# Altium PCB Lab4_PCB1.PcbDoc
Units mil, origin at the board's own origin, x right, y up, seen from the top; angles counter-clockwise.
Board outline 1355 x 1005 mil, 2 copper layers (Top Layer, Bottom Layer); 12 components, 15 nets, 46 pads, 4 vias.
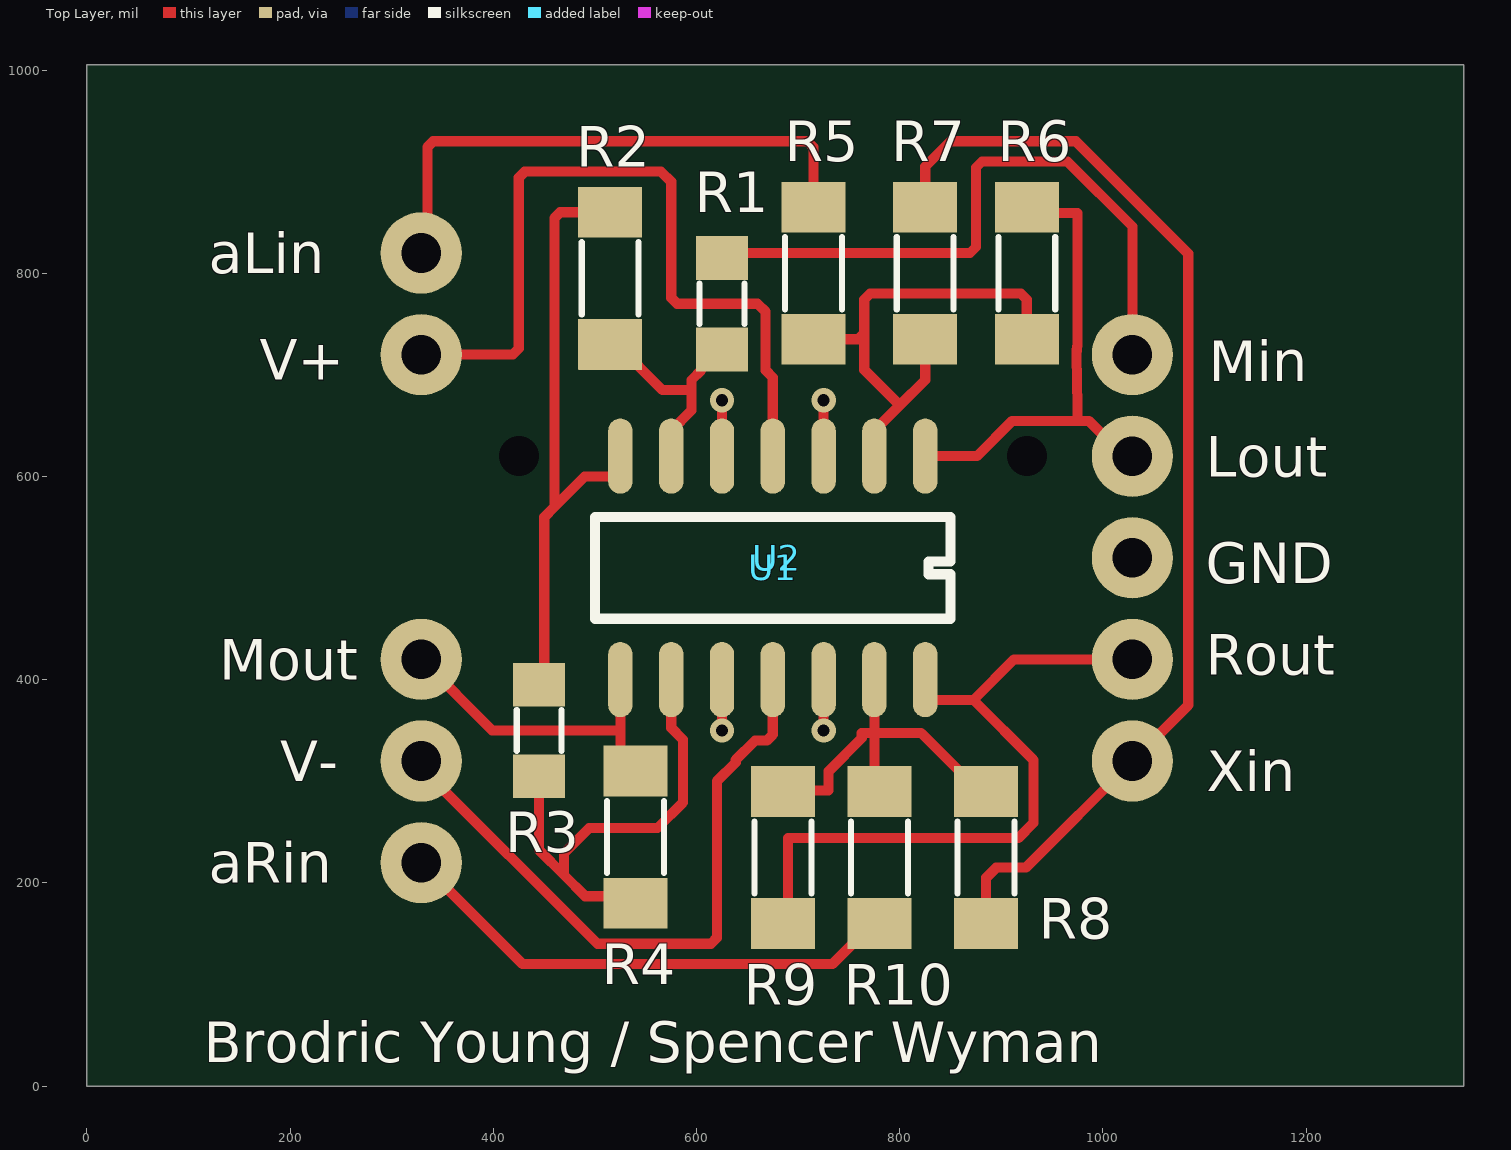
[diagram p0: Top Layer view]
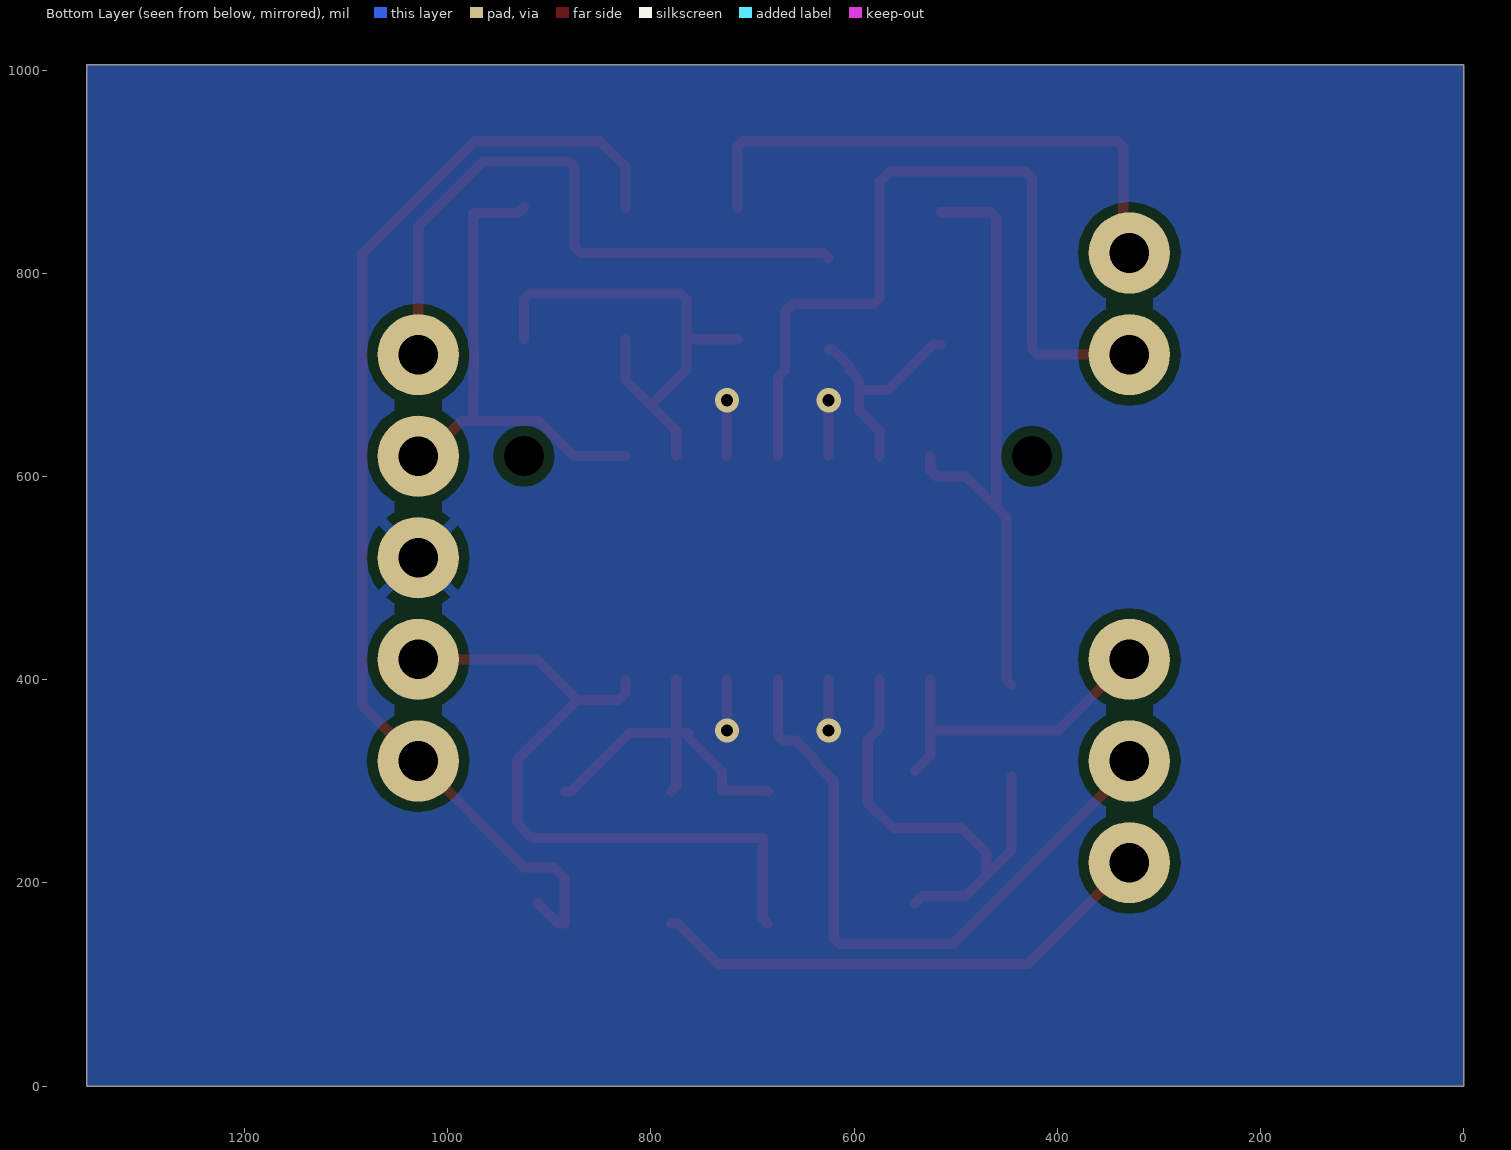
[diagram p1: Bottom Layer view, seen from below]

## Layer stack, top to bottom
Top Solder: solder mask 0.4, Solder Resist, Dk 3.5
Top Layer: signal copper 1.4
Dielectric 1: dielectric 12.6, FR-4, Dk 4.8
Bottom Layer: signal copper 1.4
Bottom Solder: solder mask 0.4, Solder Resist, Dk 3.5

## Board outline
0,0 0,1005 1355,1005 1355,0

## Design rules (kind name [scope] priority, off if disabled: settings)
AssemblyTestPointUsage [All] p1: isadvanced=TRUE
AssemblyTestpoint [All] p1: isadvanced=TRUE testpointundercomponent=TRUE minsize=40 maxsize=100 preferedsize=60 minholesize=0 maxholesize=40 preferedholesize=32 testpointgrid=1 usegrid=TRUE gridtolerance=0.01 allowsidetop=TRUE allowsidebottom=TRUE
Clearance Clearance_1 [OnMid vs OnMid] p1: gap=10 ignorepadtopadclearanceinfootprint=FALSE sourcerule=43 cellrowname=All cellrowtype=0 cellcolname=All cellcoltype=0 innerlayers=TRUE
Clearance Clearance_2 [(ExistsOnLayer('Top Layer') Or ExistsOnLayer('Bottom Layer')) vs (ExistsOnLayer('Top Layer') Or ExistsOnLayer('Bottom Layer'))] p2: gap=10 ignorepadtopadclearanceinfootprint=FALSE sourcerule=43 cellrowname=All cellrowtype=0 cellcolname=All cellcoltype=0 outerlayers=TRUE
Clearance [All] p3: gap=10 ignorepadtopadclearanceinfootprint=FALSE ismatrix=TRUE
ComponentClearance [All] p1: isadvanced=TRUE gap=10 collisioncheckmode=3 verticalgap=10 showdistances=FALSE
FabricationTestPointUsage [All] p1: isadvanced=TRUE valid=0 allowmultiple=FALSE
FabricationTestpoint [All] p1: isadvanced=TRUE side=3 testpointundercomponent=TRUE minsize=40 maxsize=100 preferedsize=60 minholesize=0 maxholesize=40 preferedholesize=32 testpointgrid=1 allowsidetop=TRUE allowsidebottom=TRUE usegrid=TRUE gridtolerance=0.01
FanoutControl Fanout_BGA [IsBGA] p1: isadvanced=TRUE bgadir=Out bgaviamode=Centered fanoutstyle=Auto fanoutdirection=Alternating viagrid=1 // Fanout_BGA (Default Rule)
FanoutControl Fanout_LCC [IsLCC] p2: isadvanced=TRUE bgadir=Out bgaviamode=Centered fanoutstyle=Auto fanoutdirection=Alternating viagrid=1 // Fanout_LCC (Default Rule)
FanoutControl Fanout_SOIC [IsSOIC] p3: isadvanced=TRUE bgadir=Out bgaviamode=Centered fanoutstyle=Auto fanoutdirection=Alternating viagrid=1 // Fanout_SOIC (Default Rule)
FanoutControl Fanout_Small [(CompPinCount < 5)] p4: isadvanced=TRUE bgadir=Out bgaviamode=Centered fanoutstyle=Auto fanoutdirection=OutThenIn viagrid=1 // Fanout_Small (Default Rule)
FanoutControl Fanout_Default [All] p5: isadvanced=TRUE bgadir=Out bgaviamode=Centered fanoutstyle=Auto fanoutdirection=Alternating viagrid=1 // Fanout_Default (Default Rule)
Height [All] p1: isadvanced=TRUE minheight=0 maxheight=1000 prefheight=500
HoleSize [All] p1: isadvanced=TRUE absolutevalues=TRUE maxlimit=100 minlimit=1 maxpercent=80.000 minpercent=20.000
HoleToHoleClearance [All] p1: isadvanced=TRUE gap=10 allowstackedmicrovias=TRUE
LayerPairs [All] p1: isadvanced=TRUE enforce=TRUE
MinimumSolderMaskSliver [All] p1: isadvanced=TRUE minsoldermaskwidth=10
NetAntennae [All] p1: isadvanced=TRUE netantennaetolerance=0
PasteMaskExpansion [All] p1: isadvanced=TRUE expansion=0
PlaneClearance [All] p1: isadvanced=TRUE clearance=20
PlaneConnect [All] p1: isadvanced=TRUE planeconnectstyle=Relief reliefexpansion=20 reliefentries=4 reliefconductorwidth=10 reliefairgap=10
PolygonConnect [All] p1: thpad.connectstyle=Relief thpad.reliefconductorwidth=10 thpad.reliefentries=4 thpad.polygonreliefangle="45 Angle" thpad.airgapwidth=10 smdpad.connectstyle=Relief smdpad.reliefconductorwidth=10 smdpad.reliefentries=4 smdpad.polygonreliefangle="90 Angle" smdpad.airgapwidth=10 via.connectstyle=Direct via.reliefconductorwidth=10 via.reliefentries=4 via.polygonreliefangle="90 Angle" via.airgapwidth=10
RoutingCorners [All] p1: isadvanced=TRUE cornerstyle=45-Degree minsetback=100 maxsetback=100
RoutingPriority [All] p1: isadvanced=TRUE routingpriority=0
RoutingVias [All] p1: holewidth=12 width=24 viastyle="Through Hole" minholewidth=12 minwidth=24 maxholewidth=12 maxwidth=24
ShortCircuit [All] p1: isadvanced=TRUE allowed=FALSE
SilkToSilkClearance [All] p1: isadvanced=TRUE silktosilkclearance=10
SilkToSolderMaskClearance [IsPad] p1: isadvanced=TRUE minsilkscreentomaskgap=10 clearancetoexposedcopper=TRUE
SolderMaskExpansion [All] p1: isadvanced=TRUE expansion=4 istentingtop=FALSE
SupplyNets "Schematic Supply Nets_6" [InNet('aLin')] p1: isadvanced=TRUE voltage=0.000
SupplyNets "Schematic Supply Nets_5" [InNet('Xin')] p2: isadvanced=TRUE voltage=0.000
SupplyNets "Schematic Supply Nets_4" [InNet('V+')] p3: isadvanced=TRUE voltage=0.000
SupplyNets "Schematic Supply Nets_3" [InNet('GND')] p4: isadvanced=TRUE voltage=0.000
SupplyNets "Schematic Supply Nets_2" [InNet('V-')] p5: isadvanced=TRUE voltage=0.000
SupplyNets "Schematic Supply Nets_1" [InNet('Min')] p6: isadvanced=TRUE voltage=0.000
SupplyNets "Schematic Supply Nets" [InNet('aRin')] p7: isadvanced=TRUE voltage=0.000
UnRoutedNet [All] p1: isadvanced=TRUE
UnpouredPolygon [All] p1: isadvanced=TRUE
Width [All] p1: maxlimit=10 minlimit=10 preferedwidth=10
4 further rules are at their usual default settings.

## Components (designator, comment, footprint, x,y, rotation, side; value= is the part's Value field where it differs from the comment)
R1 "KBS_Resistor" KBS_SMD0805 625,815 r270 top value=600
R2 "KBS_Resistor" KBS_SMD1206 515,730 r90 top value=10k
R3 "KBS_Resistor" KBS_SMD0805 445,395 r270 top value=600
R4 "KBS_Resistor" KBS_SMD1206 540,180 r90 top value=10k
R5 "KBS_Resistor" KBS_SMD1206 715,865 r270 top value=10k
R6 "KBS_Resistor" KBS_SMD1206 925,735 r90 top value=10k
R7 "KBS_Resistor" KBS_SMD1206 825,865 r270 top value=10k
R8 "KBS_Resistor" KBS_SMD1206 885,160 r90 top value=10k
R9 "KBS_Resistor" KBS_SMD1206 685,290 r270 top value=10k
R10 "KBS_Resistor" KBS_SMD1206 780,160 r90 top value=10k
U1 "LF347DR" KBS_SO14_w_Guide_Pin_Holes 675,510 r180 top
U2 "10 Pin Header" KBS_10pin_Header_PreA_Mixer 1029,519.93 r0 top locked

## Footprints (in the part's own frame and the unit in brackets; to place one, negate y for a bottom-side part, rotate by r counter-clockwise, add the part's x,y. Pads: shape width x height; smd on the part's side, far side on the other; paste and mask are expansions set on the pad)
KBS_10pin_Header_PreA_Mixer [mil]
  round 80 hole 39 mask+2: 1(-700,300) 2(0,200) 3(-700,200) 4(0,100) 5(-700,-100) 6(0,0) 7(-700,-200) 8(0,-100) 9(-700,-300) 10(0,-200)
  body extent -740,-340 40,340, height 1
KBS_SMD0805 [mil]
  rrect1% 43x51 smd mask+2.5: 1(0,0) 2(90,0)
  silkscreen extent 25,-22 65,22, body extent -21,-26 112,25, height 1
KBS_SMD1206 [mil]
  rrect1% 50x63 smd mask+2.5: 1(0,0) 2(130,0)
  silkscreen extent 30,-28 100,28, body extent -24,-32 155,31, height 1
KBS_SO14_w_Guide_Pin_Holes [mil]
  oval 24x74 smd paste+0 mask+2: 1(-150,-110) 2(-100,-110) 3(-50,-110) 4(0,-110) 5(50,-110) 6(100,-110) 7(150,-110) 8(150,110) 9(100,110) 10(50,110) 11(0,110) 12(-50,110) 13(-100,110) 14(-150,110)
  round 0 hole 39.37 unplated mask+0: MH_1(250,-110) MH_2(-250,-110)
  silkscreen extent -175,-50 175,50, body extent -187,-147 187,147, height 1

## Part data
R1 R2 R3 R4 R5 R6 R7 R8 R9 R10: library part CMP-009-00177-1, "Fixed Resistor, 0.25W, 10000ohm, 200V, Surface Mount, 1206", Case/Package=1206, Manufacturer=Yageo, Manufacturer Part Number=RC1206FR-0710KL, Max Operating Temperature=155°C, Min Operating Temperature=-55°C, Power=250mW, Tolerance=1%, Component Type=Resistors, Mounting Technology="Surface Mount", Pins=2, RoHS Compliant=Yes
U1: library part CMP-014-00002-1, "Operational Amplifier, 4 Func, 13000uV Offset-Max, JFET, PDSO14", Case/Package=SOP, Manufacturer="Texas Instruments", Max Operating Temperature=70°C, Min Operating Temperature=0°C, Nominal Supply Voltage=15V, Channels=4, Component Type=Amplifiers, Manufacturer Part Number=LF347DR, Pins=14, RoHS Compliant=Yes

## Via types
v1: diameter 24, hole 12, Top Layer to Bottom Layer, tented both sides, 4 vias

## Nets (pads, with @x,y where several pads share a name; then routed paths per layer and width w, separated by ;. In a path a pad name is that pad's centre, name@x,y a point inside that pad or via, vN(x,y) a via of type N, cw(c..) or ccw(c..) an arc to the next point about the centre after c; other vN are vias at no path point)
aLin: R5.1 U2.1 | length 550.7
  Top Layer w10: U2.1 335,825.93 335,924.14 340.86,930 709.14,930 715,924.14 R5.1
aRin: R10.1 U2.9 | length 509
  Top Layer w10: U2.9 428.94,120 733.5,120 773.5,160 R10.1
GND: U1.3 U1.5 U1.10 U1.12 U2.6 | length 210
  Top Layer w10: v1(625,350) U1.10 ; U1.5 v1(625,675) ; v1(725,350) U1.12 ; U1.3 v1(725,675)
Lout: R6.2 U1.1 U2.4 | length 489.7
  Top Layer w10: U1.1 875.95,620 910.63,654.69 975,654.69 ; R6.2 930.86,859.14 975,859.14 975,730.38 ccw(c1029,719.93) 974.01,719.05 975,668.83 975,654.69 ; U2.4 1020.72,619.93 985.97,654.69 975,654.69
Min: R1.1 U2.2 | length 654.5
  Top Layer w10: R1.1 630,820 869.14,820 875,825.86 875,904.14 880.86,910 965,910 1029,846 U2.2 U2.2@1020,728.93
Mout: R4.2 U1.8 U2.5 | length 321.2
  Top Layer w10: U2.5 398.94,350 525,350 ; U1.8 525,350 ; R4.2 525,325 525,350
NetR1_2: R1.2 R2.1 U1.6 | length 226.7
  Top Layer w10: R2.1 521.5,730 566.5,685 595,685 ; U1.6 575,645 595,665 595,685 ; R1.2 621,725 604.5,708.5 604.5,704.5 595,695 595,685
NetR3_2: R3.2 R4.1 U1.9 | length 474.3
  Top Layer w10: R3.2 445,232.22 469.52,207.7 ; R4.1 533.27,186.73 490.49,186.73 469.52,207.7 ; U1.9 575,352.57 586.5,341.07 586.5,278.93 561.6,254.04 494.41,254.04 469.52,229.14 469.52,207.7
NetR5_2: R5.2 R6.1 R7.2 U1.2 | length 510.8
  Top Layer w10: R5.2 759.14,735 765,740.86 ; U1.2 775,645 800,670 ; R7.2 825,695 800,670 ; R6.1 925,774.14 919.14,780 770.86,780 765,774.14 765,740.86 ; 765,740.86 765,705 800,670
NetR8_2: R8.2 R9.1 R10.2 U1.13 | length 373.8
  Top Layer w10: R9.1 685.86,290.86 730,290.86 730,310 762.5,342.5 762.5,347.5 775,347.5 ; U1.13 775,347.5 ; R10.2 775,295 775,347.5 ; R8.2 878.5,290 821,347.5 775,347.5
Rout: R9.2 U1.14 U2.8 | length 716.1
  Top Layer w10: R9.2 689.9,164.9 689.9,244.04 916.6,244.04 931.5,258.93 931.5,321.07 872.57,380 ; U1.14 825,386.47 831.47,380 872.57,380 ; U2.8 912.5,419.94 872.57,380
V+: U1.4 U2.3 | length 781.1
  Top Layer w10: U2.3 329.06,720 419.14,720 425,725.86 425,894.14 430.86,900 565,900 575,890 575,775.86 580.86,770 660,770 667.93,762.07 667.93,704.5 675,697.43 U1.4
V-: U1.11 U2.7 | length 655.5
  Top Layer w10: U2.7 329,313.43 502.43,140 614.14,140 620,145.86 620,300 638.5,318.5 638.5,321.07 657.43,340 669.14,340 675,345.86 U1.11
Vout_S1: R2.2 R3.1 U1.7 | length 616.4
  Top Layer w10: R3.1 450,400 450,560 460,570 ; R2.2 465.86,860 460,854.14 460,570 ; U1.7 525,606.47 518.53,600 490,600 460,570
Xin: R7.1 R8.1 U2.10 | length 1148.5
  Top Layer w10: R7.1 825,905 850,930 973.28,930 1084,819.28 1084,374.94 U2.10 924.07,215 895,215 885,205 R8.1 891.25,160 R8.1@911.25,180
pads on no net: U1.MH_1 U1.MH_2

## Polygon pours and split planes (outlines as drawn)
GND on Bottom Layer "GND_L02_P000" (solid, pour order 0): 0,0 0,1005 1355,1005 1355,0

## Silkscreen, mask and mechanical layers (free items; w line width, h text height)
Top Overlay:
  text "Brodric Young / Spencer Wyman" at 115,23.33 h40
Mechanical 1:
  the board outline again, w10

## Text inside footprints (layer, text, board x,y; h text height)
U2: Top Overlay "aLin" at 120,800 h40; Top Overlay "V+" at 170,695 h40; Top Overlay "V-" at 190,300 h40; Top Overlay "Mout" at 130,400 h40; Top Overlay "aRin" at 120,200 h40; Top Overlay "Min" at 1104,693.93 h40; Top Overlay "Lout" at 1101,599.93 h40; Top Overlay "GND" at 1101,494.94 h40; Top Overlay "Rout" at 1101,404.94 h40; Top Overlay "Xin" at 1102,289.94 h40